# Altium PCB BridgeBoard.PcbDoc
Units mil, origin at the board's own origin, x right, y up, seen from the top; angles counter-clockwise.
Board outline 2900 x 1350 mil, 2 copper layers (Top Layer, Bottom Layer); 2 components, 104 nets, 208 pads, 0 vias.
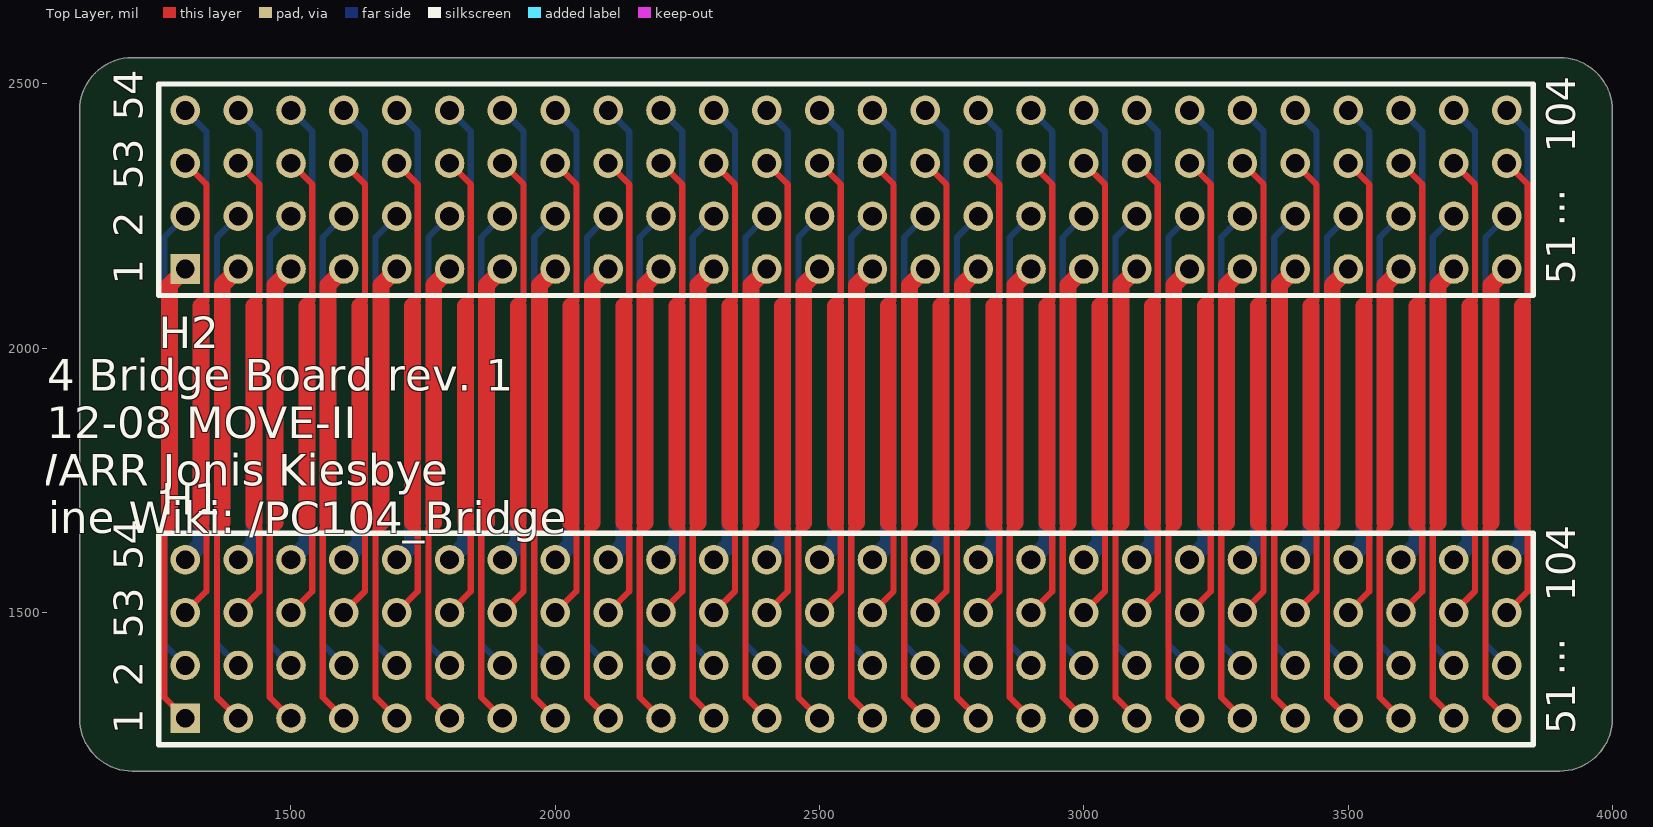
[diagram p0: Top Layer view]
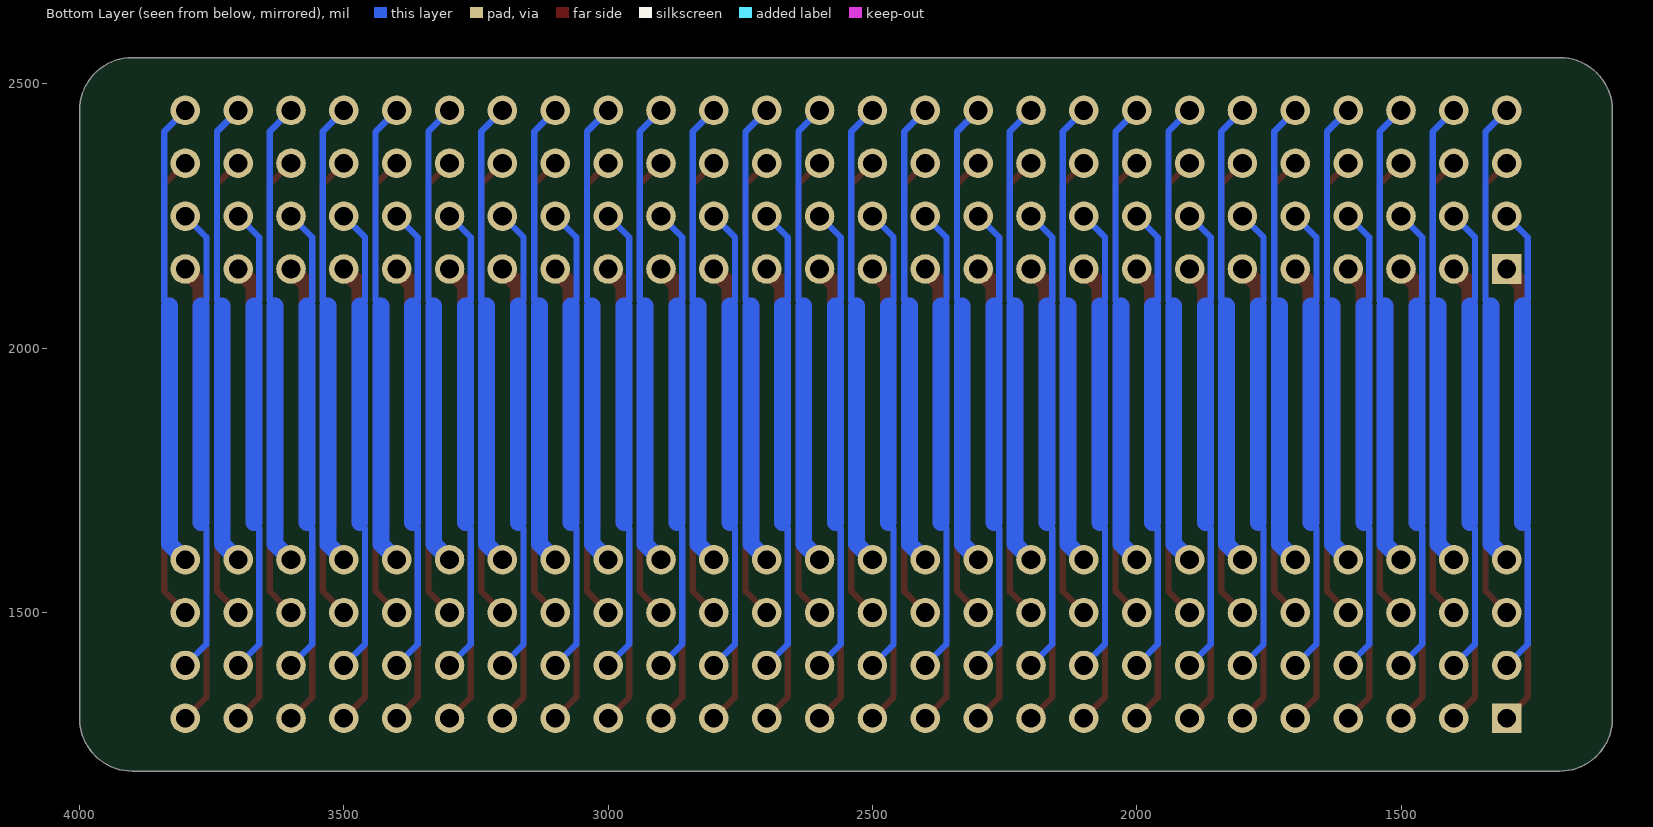
[diagram p1: Bottom Layer view, seen from below]

## Layer stack, top to bottom
Top Solder: solder mask 0.4, Solder Resist, Dk 3.5
Top Layer: signal copper 1.4
Dielectric 1: dielectric 12.6, FR-4, Dk 4.8
Bottom Layer: signal copper 1.4
Bottom Solder: solder mask 0.4, Solder Resist, Dk 3.5

## Board outline
1300,1200 1200,1200 cw(c1200,1300) 1100,1300 1100,2450 cw(c1200,2450) 1200,2550 1300,2550 2600,2550 3900,2550 cw(c3900,2450) 4000,2450 4000,1300 cw(c3900,1300) 3900,1200 1400,1200

## Design rules (kind name [scope] priority, off if disabled: settings)
Clearance [All] p1: gap=6
PolygonConnect [All] p1: connectstyle=Relief reliefconductorwidth=10 reliefentries=4 polygonreliefangle="90 Angle" airgapwidth=10
RoutingVias [All] p1: holewidth=28 width=50 viastyle="Through Hole" minholewidth=28 minwidth=50 maxholewidth=28 maxwidth=50
SolderMaskExpansion [All] p1: expansion=4
Width [All] p1: maxlimit=32 minlimit=5 preferedwidth=12
30 further rules are at their usual default settings.

## Components (designator, comment, footprint, x,y, rotation, side; value= is the part's Value field where it differs from the comment)
H1 "MOVE-II PC104" PC104 1300,1300 r0 top
H2 "MOVE-II PC104" PC104 1300,2150 r0 top

## Footprints (in the part's own frame and the unit in brackets; to place one, negate y for a bottom-side part, rotate by r counter-clockwise, add the part's x,y. Pads: shape width x height; smd on the part's side, far side on the other; paste and mask are expansions set on the pad)
PC104 [mil] "3rd gen 1U EPS from clydespace"
  rect 56x56 hole 35.43: 1(0,0)
  round 56 hole 35.43: 2(0,100) 3(100,0) 4(100,100) 5(200,0) 6(200,100) 7(300,0) 8(300,100) 9(400,0) 10(400,100) 11(500,0) 12(500,100) 13(600,0) 14(600,100) 15(700,0) 16(700,100) 17(800,0) 18(800,100) 19(900,0) 20(900,100) 21(1000,0) 22(1000,100) 23(1100,0) 24(1100,100) 25(1200,0) 26(1200,100) 27(1300,0) 28(1300,100) 29(1400,0) 30(1400,100) 31(1500,0) 32(1500,100) 33(1600,0) 34(1600,100) 35(1700,0) 36(1700,100) 37(1800,0) 38(1800,100) 39(1900,0) 40(1900,100) 41(2000,0) 42(2000,100) 43(2100,0) 44(2100,100) 45(2200,0) 46(2200,100) 47(2300,0) 48(2300,100) 49(2400,0) 50(2400,100) 51(2500,0) 52(2500,100) 53(0,200) 54(0,300) 55(100,200) 56(100,300) 57(200,200) 58(200,300) 59(300,200) 60(300,300) 61(400,200) 62(400,300) 63(500,200) 64(500,300) 65(600,200) 66(600,300) 67(700,200) 68(700,300) 69(800,200) 70(800,300) 71(900,200) 72(900,300) 73(1000,200) 74(1000,300) 75(1100,200) 76(1100,300) 77(1200,200) 78(1200,300) 79(1300,200) 80(1300,300) 81(1400,200) 82(1400,300) 83(1500,200) 84(1500,300) 85(1600,200) 86(1600,300) 87(1700,200) 88(1700,300) 89(1800,200) 90(1800,300) 91(1900,200) 92(1900,300) 93(2000,200) 94(2000,300) 95(2100,200) 96(2100,300) 97(2200,200) 98(2200,300) 99(2300,200) 100(2300,300) 101(2400,200) 102(2400,300) 103(2500,200) 104(2500,300)
  silkscreen extent -50,-50 2550,350

## Nets (pads, with @x,y where several pads share a name; then routed paths per layer and width w, separated by ;. In a path a pad name is that pad's centre, name@x,y a point inside that pad or via, vN(x,y) a via of type N, cw(c..) or ccw(c..) an arc to the next point about the centre after c; other vN are vias at no path point)
TRACE1: H1.1 H2.1 | length 883.1
  Top Layer w12: 1270,1670 1260,1660 1260,1340 H1.1
  Top Layer w32: 1270,1670 1270,2120 H2.1
TRACE2: H1.3 H2.3 | length 883.1
  Top Layer w12: 1370,1670 1360,1660 1360,1340 H1.3
  Top Layer w32: 1370,1670 1370,2120 H2.3
TRACE3: H1.5 H2.5 | length 883.1
  Top Layer w12: 1470,1670 1460,1660 1460,1340 H1.5
  Top Layer w32: 1470,1670 1470,2120 H2.5
TRACE4: H1.7 H2.7 | length 883.1
  Top Layer w12: 1570,1670 1560,1660 1560,1340 H1.7
  Top Layer w32: 1570,1670 1570,2120 H2.7
TRACE5: H1.9 H2.9 | length 883.1
  Top Layer w12: 1670,1670 1660,1660 1660,1340 H1.9
  Top Layer w32: 1670,1670 1670,2120 H2.9
TRACE6: H1.11 H2.11 | length 883.1
  Top Layer w12: 1770,1670 1760,1660 1760,1340 H1.11
  Top Layer w32: 1770,1670 1770,2120 H2.11
TRACE7: H1.13 H2.13 | length 883.1
  Top Layer w12: 1870,1670 1860,1660 1860,1340 H1.13
  Top Layer w32: 1870,1670 1870,2120 H2.13
TRACE8: H1.15 H2.15 | length 883.1
  Top Layer w12: 1970,1670 1960,1660 1960,1340 H1.15
  Top Layer w32: 1970,1670 1970,2120 H2.15
TRACE9: H1.17 H2.17 | length 883.1
  Top Layer w12: 2070,1670 2060,1660 2060,1340 H1.17
  Top Layer w32: 2070,1670 2070,2120 H2.17
TRACE10: H1.19 H2.19 | length 883.1
  Top Layer w12: 2170,1670 2160,1660 2160,1340 H1.19
  Top Layer w32: 2170,1670 2170,2120 H2.19
TRACE11: H1.21 H2.21 | length 883.1
  Top Layer w12: 2270,1670 2260,1660 2260,1340 H1.21
  Top Layer w32: 2270,1670 2270,2120 H2.21
TRACE12: H1.23 H2.23 | length 883.1
  Top Layer w12: 2370,1670 2360,1660 2360,1340 H1.23
  Top Layer w32: 2370,1670 2370,2120 H2.23
TRACE13: H1.25 H2.25 | length 883.1
  Top Layer w12: 2470,1670 2460,1660 2460,1340 H1.25
  Top Layer w32: 2470,1670 2470,2120 H2.25
TRACE14: H1.27 H2.27 | length 883.1
  Top Layer w12: 2570,1670 2560,1660 2560,1340 H1.27
  Top Layer w32: 2570,1670 2570,2120 H2.27
TRACE15: H1.29 H2.29 | length 883.1
  Top Layer w12: 2670,1670 2660,1660 2660,1340 H1.29
  Top Layer w32: 2670,1670 2670,2120 H2.29
TRACE16: H1.31 H2.31 | length 883.1
  Top Layer w12: 2770,1670 2760,1660 2760,1340 H1.31
  Top Layer w32: 2770,1670 2770,2120 H2.31
TRACE17: H1.33 H2.33 | length 883.1
  Top Layer w12: 2870,1670 2860,1660 2860,1340 H1.33
  Top Layer w32: 2870,1670 2870,2120 H2.33
TRACE18: H1.35 H2.35 | length 883.1
  Top Layer w12: 2970,1670 2960,1660 2960,1340 H1.35
  Top Layer w32: 2970,1670 2970,2120 H2.35
TRACE19: H1.37 H2.37 | length 883.1
  Top Layer w12: 3070,1670 3060,1660 3060,1340 H1.37
  Top Layer w32: 3070,1670 3070,2120 H2.37
TRACE20: H1.39 H2.39 | length 883.1
  Top Layer w12: 3170,1670 3160,1660 3160,1340 H1.39
  Top Layer w32: 3170,1670 3170,2120 H2.39
TRACE21: H1.41 H2.41 | length 883.1
  Top Layer w12: 3270,1670 3260,1660 3260,1340 H1.41
  Top Layer w32: 3270,1670 3270,2120 H2.41
TRACE22: H1.43 H2.43 | length 883.1
  Top Layer w12: 3370,1670 3360,1660 3360,1340 H1.43
  Top Layer w32: 3370,1670 3370,2120 H2.43
TRACE23: H1.45 H2.45 | length 883.1
  Top Layer w12: 3470,1670 3460,1660 3460,1340 H1.45
  Top Layer w32: 3470,1670 3470,2120 H2.45
TRACE24: H1.47 H2.47 | length 883.1
  Top Layer w12: 3570,1670 3560,1660 3560,1340 H1.47
  Top Layer w32: 3570,1670 3570,2120 H2.47
TRACE25: H1.49 H2.49 | length 883.1
  Top Layer w12: 3670,1670 3660,1660 3660,1340 H1.49
  Top Layer w32: 3670,1670 3670,2120 H2.49
TRACE26: H1.51 H2.51 | length 883.1
  Top Layer w12: 3770,1670 3760,1660 3760,1340 H1.51
  Top Layer w32: 3770,1670 3770,2120 H2.51
TRACE27: H1.2 H2.2 | length 891.4
  Bottom Layer w12: 1270,1670 1260,1660 1260,1440 H1.2 ; 1270,2080 1260,2090 1260,2210 H2.2
  Bottom Layer w32: 1270,1670 1270,2080
TRACE28: H1.4 H2.4 | length 891.4
  Bottom Layer w12: 1370,1670 1360,1660 1360,1440 H1.4 ; 1370,2080 1360,2090 1360,2210 H2.4
  Bottom Layer w32: 1370,1670 1370,2080
TRACE29: H1.6 H2.6 | length 891.4
  Bottom Layer w12: 1470,1670 1460,1660 1460,1440 H1.6 ; 1470,2080 1460,2090 1460,2210 H2.6
  Bottom Layer w32: 1470,1670 1470,2080
TRACE30: H1.8 H2.8 | length 891.4
  Bottom Layer w12: 1570,1670 1560,1660 1560,1440 H1.8 ; 1570,2080 1560,2090 1560,2210 H2.8
  Bottom Layer w32: 1570,1670 1570,2080
TRACE31: H1.10 H2.10 | length 891.4
  Bottom Layer w12: 1670,1670 1660,1660 1660,1440 H1.10 ; 1670,2080 1660,2090 1660,2210 H2.10
  Bottom Layer w32: 1670,1670 1670,2080
TRACE32: H1.12 H2.12 | length 891.4
  Bottom Layer w12: 1770,1670 1760,1660 1760,1440 H1.12 ; 1770,2080 1760,2090 1760,2210 H2.12
  Bottom Layer w32: 1770,1670 1770,2080
TRACE33: H1.14 H2.14 | length 891.4
  Bottom Layer w12: 1870,1670 1860,1660 1860,1440 H1.14 ; 1870,2080 1860,2090 1860,2210 H2.14
  Bottom Layer w32: 1870,1670 1870,2080
TRACE34: H1.16 H2.16 | length 891.4
  Bottom Layer w12: 1970,1670 1960,1660 1960,1440 H1.16 ; 1970,2080 1960,2090 1960,2210 H2.16
  Bottom Layer w32: 1970,1670 1970,2080
TRACE35: H1.18 H2.18 | length 891.4
  Bottom Layer w12: 2070,1670 2060,1660 2060,1440 H1.18 ; 2070,2080 2060,2090 2060,2210 H2.18
  Bottom Layer w32: 2070,1670 2070,2080
TRACE36: H1.20 H2.20 | length 891.4
  Bottom Layer w12: 2170,1670 2160,1660 2160,1440 H1.20 ; 2170,2080 2160,2090 2160,2210 H2.20
  Bottom Layer w32: 2170,1670 2170,2080
TRACE37: H1.22 H2.22 | length 891.4
  Bottom Layer w12: 2270,1670 2260,1660 2260,1440 H1.22 ; 2270,2080 2260,2090 2260,2210 H2.22
  Bottom Layer w32: 2270,1670 2270,2080
TRACE38: H1.24 H2.24 | length 891.4
  Bottom Layer w12: 2370,1670 2360,1660 2360,1440 H1.24 ; 2370,2080 2360,2090 2360,2210 H2.24
  Bottom Layer w32: 2370,1670 2370,2080
TRACE39: H1.26 H2.26 | length 891.4
  Bottom Layer w12: 2470,1670 2460,1660 2460,1440 H1.26 ; 2470,2080 2460,2090 2460,2210 H2.26
  Bottom Layer w32: 2470,1670 2470,2080
TRACE40: H1.28 H2.28 | length 891.4
  Bottom Layer w12: 2570,1670 2560,1660 2560,1440 H1.28 ; 2570,2080 2560,2090 2560,2210 H2.28
  Bottom Layer w32: 2570,1670 2570,2080
TRACE41: H1.30 H2.30 | length 891.4
  Bottom Layer w12: 2670,1670 2660,1660 2660,1440 H1.30 ; 2670,2080 2660,2090 2660,2210 H2.30
  Bottom Layer w32: 2670,1670 2670,2080
TRACE42: H1.32 H2.32 | length 891.4
  Bottom Layer w12: 2770,1670 2760,1660 2760,1440 H1.32 ; 2770,2080 2760,2090 2760,2210 H2.32
  Bottom Layer w32: 2770,1670 2770,2080
TRACE43: H1.34 H2.34 | length 891.4
  Bottom Layer w12: 2870,1670 2860,1660 2860,1440 H1.34 ; 2870,2080 2860,2090 2860,2210 H2.34
  Bottom Layer w32: 2870,1670 2870,2080
TRACE44: H1.36 H2.36 | length 891.4
  Bottom Layer w12: 2970,1670 2960,1660 2960,1440 H1.36 ; 2970,2080 2960,2090 2960,2210 H2.36
  Bottom Layer w32: 2970,1670 2970,2080
TRACE45: H1.38 H2.38 | length 891.4
  Bottom Layer w12: 3070,1670 3060,1660 3060,1440 H1.38 ; 3070,2080 3060,2090 3060,2210 H2.38
  Bottom Layer w32: 3070,1670 3070,2080
TRACE46: H1.40 H2.40 | length 891.4
  Bottom Layer w12: 3170,1670 3160,1660 3160,1440 H1.40 ; 3170,2080 3160,2090 3160,2210 H2.40
  Bottom Layer w32: 3170,1670 3170,2080
TRACE47: H1.42 H2.42 | length 891.4
  Bottom Layer w12: 3270,1670 3260,1660 3260,1440 H1.42 ; 3270,2080 3260,2090 3260,2210 H2.42
  Bottom Layer w32: 3270,1670 3270,2080
TRACE48: H1.44 H2.44 | length 891.4
  Bottom Layer w12: 3370,1670 3360,1660 3360,1440 H1.44 ; 3370,2080 3360,2090 3360,2210 H2.44
  Bottom Layer w32: 3370,1670 3370,2080
TRACE49: H1.46 H2.46 | length 891.4
  Bottom Layer w12: 3470,1670 3460,1660 3460,1440 H1.46 ; 3470,2080 3460,2090 3460,2210 H2.46
  Bottom Layer w32: 3470,1670 3470,2080
TRACE50: H1.48 H2.48 | length 891.4
  Bottom Layer w12: 3570,1670 3560,1660 3560,1440 H1.48 ; 3570,2080 3560,2090 3560,2210 H2.48
  Bottom Layer w32: 3570,1670 3570,2080
TRACE51: H1.50 H2.50 | length 891.4
  Bottom Layer w12: 3670,1670 3660,1660 3660,1440 H1.50 ; 3670,2080 3660,2090 3660,2210 H2.50
  Bottom Layer w32: 3670,1670 3670,2080
TRACE52: H1.52 H2.52 | length 891.4
  Bottom Layer w12: 3770,1670 3760,1660 3760,1440 H1.52 ; 3770,2080 3760,2090 3760,2210 H2.52
  Bottom Layer w32: 3770,1670 3770,2080
TRACE53: H1.53 H2.53 | length 891.4
  Top Layer w12: H1.53 1340,1540 1340,1660 1330,1670 ; H2.53 1340,2310 1340,2090 1330,2080
  Top Layer w32: 1330,1670 1330,2080
TRACE54: H1.55 H2.55 | length 891.4
  Top Layer w12: H1.55 1440,1540 1440,1660 1430,1670 ; H2.55 1440,2310 1440,2090 1430,2080
  Top Layer w32: 1430,1670 1430,2080
TRACE55: H1.57 H2.57 | length 891.4
  Top Layer w12: H1.57 1540,1540 1540,1660 1530,1670 ; H2.57 1540,2310 1540,2090 1530,2080
  Top Layer w32: 1530,1670 1530,2080
TRACE56: H1.59 H2.59 | length 891.4
  Top Layer w12: H1.59 1640,1540 1640,1660 1630,1670 ; H2.59 1640,2310 1640,2090 1630,2080
  Top Layer w32: 1630,1670 1630,2080
TRACE57: H1.61 H2.61 | length 891.4
  Top Layer w12: H1.61 1740,1540 1740,1660 1730,1670 ; H2.61 1740,2310 1740,2090 1730,2080
  Top Layer w32: 1730,1670 1730,2080
TRACE58: H1.63 H2.63 | length 891.4
  Top Layer w12: H1.63 1840,1540 1840,1660 1830,1670 ; H2.63 1840,2310 1840,2090 1830,2080
  Top Layer w32: 1830,1670 1830,2080
TRACE59: H1.65 H2.65 | length 891.4
  Top Layer w12: H1.65 1940,1540 1940,1660 1930,1670 ; H2.65 1940,2310 1940,2090 1930,2080
  Top Layer w32: 1930,1670 1930,2080
TRACE60: H1.67 H2.67 | length 891.4
  Top Layer w12: H1.67 2040,1540 2040,1660 2030,1670 ; H2.67 2040,2310 2040,2090 2030,2080
  Top Layer w32: 2030,1670 2030,2080
TRACE61: H1.69 H2.69 | length 891.4
  Top Layer w12: H1.69 2140,1540 2140,1660 2130,1670 ; H2.69 2140,2310 2140,2090 2130,2080
  Top Layer w32: 2130,1670 2130,2080
TRACE62: H1.71 H2.71 | length 891.4
  Top Layer w12: H1.71 2240,1540 2240,1660 2230,1670 ; H2.71 2240,2310 2240,2090 2230,2080
  Top Layer w32: 2230,1670 2230,2080
TRACE63: H1.73 H2.73 | length 891.4
  Top Layer w12: H1.73 2340,1540 2340,1660 2330,1670 ; H2.73 2340,2310 2340,2090 2330,2080
  Top Layer w32: 2330,1670 2330,2080
TRACE64: H1.75 H2.75 | length 891.4
  Top Layer w12: H1.75 2440,1540 2440,1660 2430,1670 ; H2.75 2440,2310 2440,2090 2430,2080
  Top Layer w32: 2430,1670 2430,2080
TRACE65: H1.77 H2.77 | length 891.4
  Top Layer w12: H1.77 2540,1540 2540,1660 2530,1670 ; H2.77 2540,2310 2540,2090 2530,2080
  Top Layer w32: 2530,1670 2530,2080
TRACE66: H1.79 H2.79 | length 891.4
  Top Layer w12: H1.79 2640,1540 2640,1660 2630,1670 ; H2.79 2640,2310 2640,2090 2630,2080
  Top Layer w32: 2630,1670 2630,2080
TRACE67: H1.81 H2.81 | length 891.4
  Top Layer w12: H1.81 2740,1540 2740,1660 2730,1670 ; H2.81 2740,2310 2740,2090 2730,2080
  Top Layer w32: 2730,1670 2730,2080
TRACE68: H1.83 H2.83 | length 891.4
  Top Layer w12: H1.83 2840,1540 2840,1660 2830,1670 ; H2.83 2840,2310 2840,2090 2830,2080
  Top Layer w32: 2830,1670 2830,2080
TRACE69: H1.85 H2.85 | length 891.4
  Top Layer w12: H1.85 2940,1540 2940,1660 2930,1670 ; H2.85 2940,2310 2940,2090 2930,2080
  Top Layer w32: 2930,1670 2930,2080
TRACE70: H1.87 H2.87 | length 891.4
  Top Layer w12: H1.87 3040,1540 3040,1660 3030,1670 ; H2.87 3040,2310 3040,2090 3030,2080
  Top Layer w32: 3030,1670 3030,2080
TRACE71: H1.89 H2.89 | length 891.4
  Top Layer w12: H1.89 3140,1540 3140,1660 3130,1670 ; H2.89 3140,2310 3140,2090 3130,2080
  Top Layer w32: 3130,1670 3130,2080
TRACE72: H1.91 H2.91 | length 891.4
  Top Layer w12: H1.91 3240,1540 3240,1660 3230,1670 ; H2.91 3240,2310 3240,2090 3230,2080
  Top Layer w32: 3230,1670 3230,2080
TRACE73: H1.93 H2.93 | length 891.4
  Top Layer w12: H1.93 3340,1540 3340,1660 3330,1670 ; H2.93 3340,2310 3340,2090 3330,2080
  Top Layer w32: 3330,1670 3330,2080
TRACE74: H1.95 H2.95 | length 891.4
  Top Layer w12: H1.95 3440,1540 3440,1660 3430,1670 ; H2.95 3440,2310 3440,2090 3430,2080
  Top Layer w32: 3430,1670 3430,2080
TRACE75: H1.97 H2.97 | length 891.4
  Top Layer w12: H1.97 3540,1540 3540,1660 3530,1670 ; H2.97 3540,2310 3540,2090 3530,2080
  Top Layer w32: 3530,1670 3530,2080
TRACE76: H1.99 H2.99 | length 891.4
  Top Layer w12: H1.99 3640,1540 3640,1660 3630,1670 ; H2.99 3640,2310 3640,2090 3630,2080
  Top Layer w32: 3630,1670 3630,2080
TRACE77: H1.101 H2.101 | length 891.4
  Top Layer w12: H1.101 3740,1540 3740,1660 3730,1670 ; H2.101 3740,2310 3740,2090 3730,2080
  Top Layer w32: 3730,1670 3730,2080
TRACE78: H1.103 H2.103 | length 891.4
  Top Layer w12: H1.103 3840,1540 3840,1660 3830,1670 ; H2.103 3840,2310 3840,2090 3830,2080
  Top Layer w32: 3830,1670 3830,2080
TRACE79: H1.54 H2.54 | length 883.1
  Bottom Layer w12: H2.54 1340,2410 1340,2090 1330,2080
  Bottom Layer w32: H1.54 1330,1630 1330,2080
TRACE80: H1.56 H2.56 | length 883.1
  Bottom Layer w12: H2.56 1440,2410 1440,2090 1430,2080
  Bottom Layer w32: H1.56 1430,1630 1430,2080
TRACE81: H1.58 H2.58 | length 883.1
  Bottom Layer w12: H2.58 1540,2410 1540,2090 1530,2080
  Bottom Layer w32: H1.58 1530,1630 1530,2080
TRACE82: H1.60 H2.60 | length 883.1
  Bottom Layer w12: H2.60 1640,2410 1640,2090 1630,2080
  Bottom Layer w32: H1.60 1630,1630 1630,2080
TRACE83: H1.62 H2.62 | length 883.1
  Bottom Layer w12: H2.62 1740,2410 1740,2090 1730,2080
  Bottom Layer w32: H1.62 1730,1630 1730,2080
TRACE84: H1.64 H2.64 | length 883.1
  Bottom Layer w12: H2.64 1840,2410 1840,2090 1830,2080
  Bottom Layer w32: H1.64 1830,1630 1830,2080
TRACE85: H1.66 H2.66 | length 883.1
  Bottom Layer w12: H2.66 1940,2410 1940,2090 1930,2080
  Bottom Layer w32: H1.66 1930,1630 1930,2080
TRACE86: H1.68 H2.68 | length 883.1
  Bottom Layer w12: H2.68 2040,2410 2040,2090 2030,2080
  Bottom Layer w32: H1.68 2030,1630 2030,2080
TRACE87: H1.70 H2.70 | length 883.1
  Bottom Layer w12: H2.70 2140,2410 2140,2090 2130,2080
  Bottom Layer w32: H1.70 2130,1630 2130,2080
TRACE88: H1.72 H2.72 | length 883.1
  Bottom Layer w12: H2.72 2240,2410 2240,2090 2230,2080
  Bottom Layer w32: H1.72 2230,1630 2230,2080
TRACE89: H1.74 H2.74 | length 883.1
  Bottom Layer w12: H2.74 2340,2410 2340,2090 2330,2080
  Bottom Layer w32: H1.74 2330,1630 2330,2080
TRACE90: H1.76 H2.76 | length 883.1
  Bottom Layer w12: H2.76 2440,2410 2440,2090 2430,2080
  Bottom Layer w32: H1.76 2430,1630 2430,2080
TRACE91: H1.78 H2.78 | length 883.1
  Bottom Layer w12: H2.78 2540,2410 2540,2090 2530,2080
  Bottom Layer w32: H1.78 2530,1630 2530,2080
TRACE92: H1.80 H2.80 | length 883.1
  Bottom Layer w12: H2.80 2640,2410 2640,2090 2630,2080
  Bottom Layer w32: H1.80 2630,1630 2630,2080
TRACE93: H1.82 H2.82 | length 883.1
  Bottom Layer w12: H2.82 2740,2410 2740,2090 2730,2080
  Bottom Layer w32: H1.82 2730,1630 2730,2080
TRACE94: H1.84 H2.84 | length 883.1
  Bottom Layer w12: H2.84 2840,2410 2840,2090 2830,2080
  Bottom Layer w32: H1.84 2830,1630 2830,2080
TRACE95: H1.86 H2.86 | length 883.1
  Bottom Layer w12: H2.86 2940,2410 2940,2090 2930,2080
  Bottom Layer w32: H1.86 2930,1630 2930,2080
TRACE96: H1.88 H2.88 | length 883.1
  Bottom Layer w12: H2.88 3040,2410 3040,2090 3030,2080
  Bottom Layer w32: H1.88 3030,1630 3030,2080
TRACE97: H1.90 H2.90 | length 883.1
  Bottom Layer w12: H2.90 3140,2410 3140,2090 3130,2080
  Bottom Layer w32: H1.90 3130,1630 3130,2080
TRACE98: H1.92 H2.92 | length 883.1
  Bottom Layer w12: H2.92 3240,2410 3240,2090 3230,2080
  Bottom Layer w32: H1.92 3230,1630 3230,2080
TRACE99: H1.94 H2.94 | length 883.1
  Bottom Layer w12: H2.94 3340,2410 3340,2090 3330,2080
  Bottom Layer w32: H1.94 3330,1630 3330,2080
TRACE100: H1.96 H2.96 | length 883.1
  Bottom Layer w12: H2.96 3440,2410 3440,2090 3430,2080
  Bottom Layer w32: H1.96 3430,1630 3430,2080
TRACE101: H1.98 H2.98 | length 883.1
  Bottom Layer w12: H2.98 3540,2410 3540,2090 3530,2080
  Bottom Layer w32: H1.98 3530,1630 3530,2080
TRACE102: H1.100 H2.100 | length 883.1
  Bottom Layer w12: H2.100 3640,2410 3640,2090 3630,2080
  Bottom Layer w32: H1.100 3630,1630 3630,2080
TRACE103: H1.102 H2.102 | length 883.1
  Bottom Layer w12: H2.102 3740,2410 3740,2090 3730,2080
  Bottom Layer w32: H1.102 3730,1630 3730,2080
TRACE104: H1.104 H2.104 | length 883.1
  Bottom Layer w12: H2.104 3840,2410 3840,2090 3830,2080
  Bottom Layer w32: H1.104 3830,1630 3830,2080

## Silkscreen, mask and mechanical layers (free items; w line width, h text height)
Top Overlay:
  text "54" at 1220,2430 h55 r90
  text "104" at 3930,2370 h55 r90
  text "53" at 1220,2300 h55 r90
  text "..." at 3910,2230 h55 r90
  text "2" at 1220,2210 h55 r90
  text "1" at 1220,2120 h55 r90
  text "51" at 3930,2120 h55 r90
  text "PC/104 Bridge Board rev. 1 / 2016-12-08 MOVE-II / LRT WARR Jonis Kiesbye / Redmine Wiki: /PC104_Bridge" at 800,1650 h60
  text "54" at 1220,1580 h55 r90
  text "104" at 3930,1520 h55 r90
  text "53" at 1220,1450 h55 r90
  text "..." at 3910,1380 h55 r90
  text "2" at 1220,1360 h55 r90
  text "1" at 1220,1270 h55 r90
  text "51" at 3930,1270 h55 r90
Mechanical 1:
  the board outline again, w19.68